# EAGLE board CT_schematic (EAGLE 7.6.0)

Size 100 x 80 mm. Coordinates in mm from the lower left corner, seen from the top.
Outline: 0,0 100,0 100,80 0,80 0,0
Copper layers (1*16): Top 0.035mm / dielectric 1.5mm / Bottom 0.035mm
Design rules "default": minimum track width 10mil, minimum drill 24mil, track to track 8mil, track to pad 8mil, pad to pad 8mil, via to via 8mil, smd to smd 8mil, copper to edge 40mil, drill to drill 8mil, minimum pad ring 10mil, minimum via ring 8mil, stop-mask expansion 4mil, vias tented up to drill 0mil, thermal gap 10mil

## Footprints (pad centres in the part's own frame; a part is rotated, then mirrored left to right if it is on the bottom)
C0603 = smd 0.8 x 0.8: 1 -0.762,0; 2 0.762,0
C0402 = smd 0.5 x 0.5: 1 -0.508,0; 2 0.508,0
C1210 = smd 1.2 x 2.5: 1 -1.524,0; 2 1.524,0
EXV-9H = smd 3.505 x 1.676: 1 -2.857,0; 2 2.857,0
L0603 = smd 0.8 x 0.8: 1 -0.762,0; 2 0.762,0
PJ-037B_PACKAGE = drill 3.7 square: 1 12,0 | drill 3.2 square: 2 6,0
R0603 = smd 0.8 x 0.8: 1 -0.762,0; 2 0.762,0
LQFP48 = smd 0.3 x 1.2: 1 -2.75,-4.25; 2 -2.25,-4.25; 3 -1.75,-4.25; 4 -1.25,-4.25; 5 -0.75,-4.25; 6 -0.25,-4.25; 7 0.25,-4.25; 8 0.75,-4.25; 9 1.25,-4.25; 10 1.75,-4.25; 11 2.25,-4.25; 12 2.75,-4.25; 25 2.75,4.25; 26 2.25,4.25; 27 1.75,4.25; 28 1.25,4.25; 29 0.75,4.25; 30 0.25,4.25; 31 -0.25,4.25; 32 -0.75,4.25; 33 -1.25,4.25; 34 -1.75,4.25; 35 -2.25,4.25; 36 -2.75,4.25 | smd 1.2 x 0.3: 13 4.25,-2.75; 14 4.25,-2.25; 15 4.25,-1.75; 16 4.25,-1.25; 17 4.25,-0.75; 18 4.25,-0.25; 19 4.25,0.25; 20 4.25,0.75; 21 4.25,1.25; 22 4.25,1.75; 23 4.25,2.25; 24 4.25,2.75; 37 -4.25,2.75; 38 -4.25,2.25; 39 -4.25,1.75; 40 -4.25,1.25; 41 -4.25,0.75; 42 -4.25,0.25; 43 -4.25,-0.25; 44 -4.25,-0.75; 45 -4.25,-1.25; 46 -4.25,-1.75; 47 -4.25,-2.25; 48 -4.25,-2.75
SOIC-8 = smd 1.6 x 0.6: 1 -2.7,1.905 | smd 1.55 x 0.6: 2 -2.7,0.635; 3 -2.7,-0.635; 4 -2.7,-1.905; 5 2.7,-1.905; 6 2.7,-0.635; 7 2.7,0.635; 8 2.7,1.905
ABLS-25.000MHZ-B2F-T = smd 5.6 x 2.8: 1 -3.81,0; 2 5.69,0
ASEK = smd 1.4 x 1: 1 -1.1,-0.8; 2 1.1,-0.8; 3 1.1,0.8; 4 -1.1,0.8
SOIC-8_EP = smd 1.6 x 0.533: 1 -2.921,1.905; 2 -2.921,0.635; 3 -2.921,-0.635; 4 -2.921,-1.905; 5 2.921,-1.905; 6 2.921,-0.635; 7 2.921,0.635; 8 2.921,1.905 | smd 2.54 x 3.302: EPAD 0,0 | drill 0.406 pad 0.406: P$1 -0.508,0.635; P$2 0.381,0.635; P$3 -0.508,-0.635; P$4 0.381,-0.635
SON-6 = smd 0.55 x 0.3: 1 -0.355,0.5 | smd 0.52 x 0.3: 2 -0.37,0; 3 -0.37,-0.5; 4 0.37,-0.5; 5 0.37,0; 6 0.37,0.5
SW_4-1437565-2 = smd 1.4 x 2.1: 1 -2.23,4.55; 2 -2.23,-4.55; 3 2.23,4.55; 4 2.23,-4.55
LGM67K-G1J2-24-Z = smd 0.8 x 1.4: A -2,0; C 0,0
NC7SZ125M5X = smd 1.3 x 0.7: 1 -1.3,0.95; 2 -1.3,0; 3 -1.3,-0.95; 4 1.3,-0.95; 5 1.3,0.95
DUMMY_PACKAGE_90 = drill 0.3: 1 0,-1; 2 1.5,-1; 3 3,-1

## Placement (x,y rotation side)
C1  1e-07  [C0603]  -15.24,54.61 0 top  (outside the outline)
C2  1e-07  [C0603]  -19.05,54.61 0 top  (outside the outline)
C3  1e-07  [C0603]  -22.86,54.61 0 top  (outside the outline)
C4  1e-07  [C0603]  -26.67,54.61 0 top  (outside the outline)
C5  4.7e-06  [C0603]  -54.61,49.53 0 top  (outside the outline)
C6  1e-08  [C0603]  -30.48,54.61 0 top  (outside the outline)
C7  1e-06  [C0603]  -34.29,54.61 0 top  (outside the outline)
C8  1e-11  [C0402]  -15.24,59.69 0 top  (outside the outline)
C9  1e-11  [C0402]  -19.05,59.69 0 top  (outside the outline)
C10  1e-08  [C0402]  -22.86,59.69 0 top  (outside the outline)
C11  1e-08  [C0402]  -26.67,59.69 0 top  (outside the outline)
C12  1e-05  [C1210]  -16.51,43.18 0 top  (outside the outline)
C13  1e-05  [C1210]  -22.86,43.18 0 top  (outside the outline)
C14  1e-05  [C1210]  -29.21,43.18 0 top  (outside the outline)
C15  1e-05  [C1210]  -35.56,43.18 0 top  (outside the outline)
C16  1e-07  [C0402]  -30.48,59.69 0 top  (outside the outline)
C17  0.0001  [EXV-9H]  -38.1,29.21 0 top  (outside the outline)
C18  0.0001  [EXV-9H]  -49.53,29.21 0 top  (outside the outline)
C19  1e-08  [C0402]  -34.29,59.69 0 top  (outside the outline)
F1  240.0  [L0603]  -38.1,54.61 0 top  (outside the outline)
J1  PJ-037B  [PJ-037B_PACKAGE]  -27.94,7.62 0 top  (outside the outline)
R1  10000.0  [R0603]  -20.32,49.53 0 top  (outside the outline)
R2  1000.0  [R0603]  -41.91,54.61 0 top  (outside the outline)
R3  1600.5  [R0603]  -45.72,54.61 0 top  (outside the outline)
R4  4700.0  [R0603]  -49.53,54.61 0 top  (outside the outline)
R5  10000.0  [R0603]  -25.4,49.53 0 top  (outside the outline)
R6  10000.0  [R0603]  -30.48,49.53 0 top  (outside the outline)
R7  10000.0  [R0603]  -35.56,49.53 0 top  (outside the outline)
R8  10000.0  [R0603]  -40.64,49.53 0 top  (outside the outline)
R9  4031.5447154472  [R0603]  -50.8,43.18 0 top  (outside the outline)
R10  2200.0  [R0603]  -53.34,54.61 0 top  (outside the outline)
R11  10000.0  [R0603]  -45.72,49.53 0 top  (outside the outline)
R12  10000.0  [R0603]  -50.8,49.53 0 top  (outside the outline)
R13  9100.0  [R0603]  -57.15,54.61 0 top  (outside the outline)
R14  680000.0  [R0603]  -55.88,43.18 0 top  (outside the outline)
R15  120000.0  [R0603]  -15.24,49.53 0 top  (outside the outline)
U1  STM32L041C6T6  [LQFP48]  -24.13,20.32 0 top  (outside the outline)
U2  AT25M01-SSHM-T  [SOIC-8]  -40.64,19.05 0 top  (outside the outline)
U3  ABLS-25.000MHZ-B2F-T  [ABLS-25.000MHZ-B2F-T]  -26.67,36.83 0 top  (outside the outline)
U4  ASEK-32.768KHz-ECST  [ASEK]  -29.21,29.21 0 top  (outside the outline)
U5  MIC5234YME  [SOIC-8_EP]  -38.1,35.56 0 top  (outside the outline)
U6  TPS3895ADRYR  [SON-6]  -43.18,58.42 0 top  (outside the outline)
U7  4-1437565-2  [SW_4-1437565-2]  -44.45,6.35 0 top  (outside the outline)
U8  Q65110A2395  [LGM67K-G1J2-24-Z]  -46.99,36.83 0 top  (outside the outline)
U9  nc7sz125m5x  [NC7SZ125M5X]  -40.64,43.18 0 top  (outside the outline)
U10  Dummy  [DUMMY_PACKAGE_90]  -40.64,59.69 0 top  (outside the outline)

## Library data of the parts
C1-C19 F1 J1 R1-R15 U1-U10 = circuit_tree

## Nets
CLK_CRYSTAL_U1_5: C8.1 U1.5 U3.1
CLK_CRYSTAL_U1_6: C9.1 U1.6 U3.2
CLK_U1_3: U1.3 U4.3
GND: C1.2 C2.2 C3.2 C4.2 C5.2 C6.2 C7.2 C8.2 C9.2 C10.2 C11.2 C12.2 C13.2 C14.2 C15.2 C16.2 C17.2 C18.2 C19.2 J1.2 R2.2 R5.2 R10.2 R13.2 R15.2 U1.8 U1.23 U1.35 U1.47 U2.4 U4.2 U5.7 U5.EPAD U6.2 U8.C U9.1 U9.3 U10.1
NET_U1_7: R4.1 U1.7 U9.4
NET_U1_9: C6.1 C7.1 F1.1 U1.9
NET_U1_44: R5.1 U1.44
NET_U1_45: R3.1 U1.45 U8.A
NET_U1_46: R1.1 U1.46 U7.3 U7.4
NET_U2_3: R6.1 U2.3
NET_U2_7: R8.1 U2.7
NET_U5_4: R9.2 R10.1 U5.4
NET_U6_1: R12.1 R13.1 U6.1
NET_U6_3: R14.2 R15.1 U6.3
NET_U6_4: R11.1 U6.4 U9.2
NET_U7_1: R2.1 U7.1 U7.2
PROC_ADC_IN1: U1.11 U10.3
PROC_ADC_IN9: U1.19 U10.2
PROC_SPI1_MISO: U1.16 U2.2
PROC_SPI1_MOSI: U1.17 U2.5
PROC_SPI1_NSS: R7.1 U1.14 U2.1
PROC_SPI1_SCK: U1.15 U2.6
VCC_S1_14V3: C12.1 C13.1 C17.1 C18.1 J1.1 U5.5 U5.8
VCC_TIER1_3V3: C1.1 C2.1 C3.1 C4.1 C5.1 C10.1 C11.1 C14.1 C15.1 C16.1 C19.1 F1.2 R1.2 R3.2 R4.2 R6.2 R7.2 R8.2 R9.1 R11.2 R12.2 R14.1 U1.24 U1.36 U1.48 U2.8 U4.4 U5.1 U6.6 U9.5

## Tracks (layer width: path | path; a pad name or v marks a point on that pad's centre or on a via)
CLK_CRYSTAL_U1_5  (2 unrouted)
CLK_CRYSTAL_U1_6  (2 unrouted)
CLK_U1_3  (1 unrouted)
GND  (37 unrouted)
NET_U1_7  (2 unrouted)
NET_U1_9  (3 unrouted)
NET_U1_44  (1 unrouted)
NET_U1_45  (2 unrouted)
NET_U1_46  (3 unrouted)
NET_U2_3  (1 unrouted)
NET_U2_7  (1 unrouted)
NET_U5_4  (2 unrouted)
NET_U6_1  (2 unrouted)
NET_U6_3  (2 unrouted)
NET_U6_4  (2 unrouted)
NET_U7_1  (2 unrouted)
PROC_ADC_IN1  (1 unrouted)
PROC_ADC_IN9  (1 unrouted)
PROC_SPI1_MISO  (1 unrouted)
PROC_SPI1_MOSI  (1 unrouted)
PROC_SPI1_NSS  (2 unrouted)
PROC_SPI1_SCK  (1 unrouted)
VCC_S1_14V3  (6 unrouted)
VCC_TIER1_3V3  (29 unrouted)